# Altium PCB PCB3.0.PcbDoc
Units mm, origin at the board's own origin, x right, y up, seen from the top; angles counter-clockwise.
Board outline 90.41 x 90.41 mm, 2 copper layers (Top Layer, Bottom Layer); 100 components, 102 nets, 468 pads, 16 vias.
Unrouted connection lines stored in the file: 290.
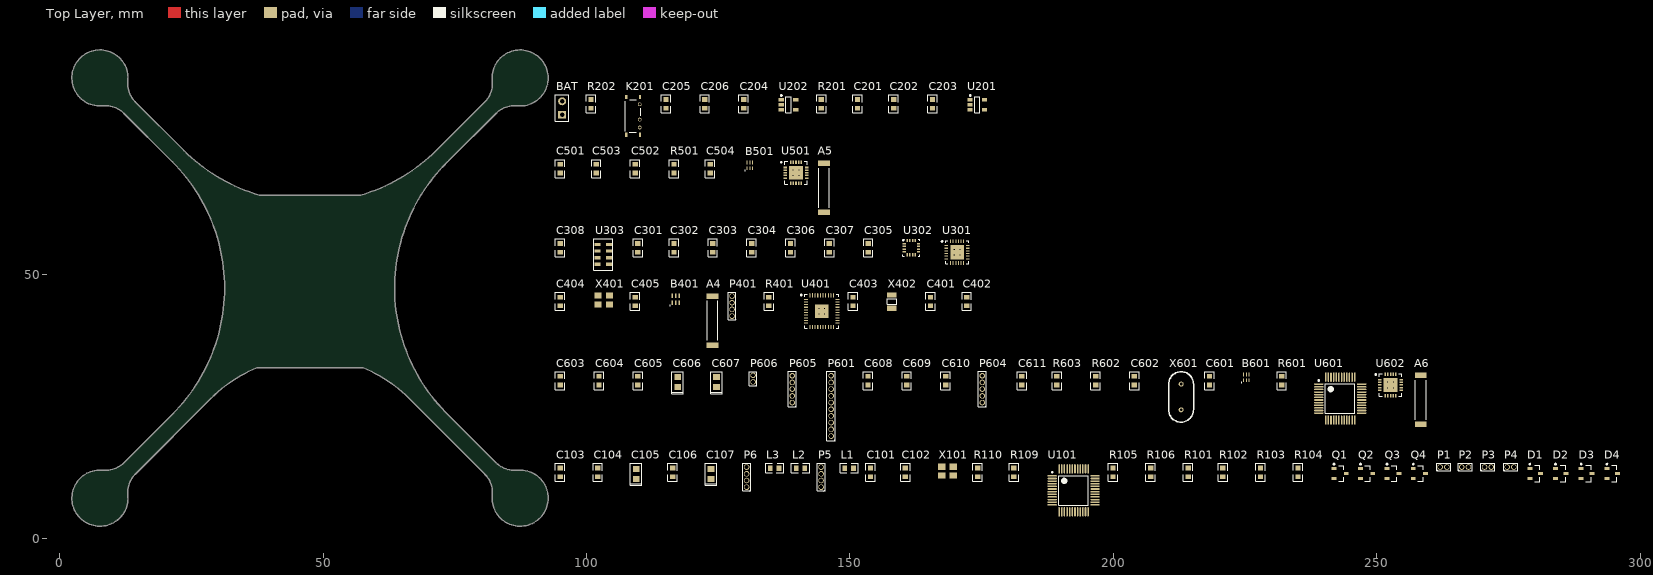
[diagram p0: Top Layer view]
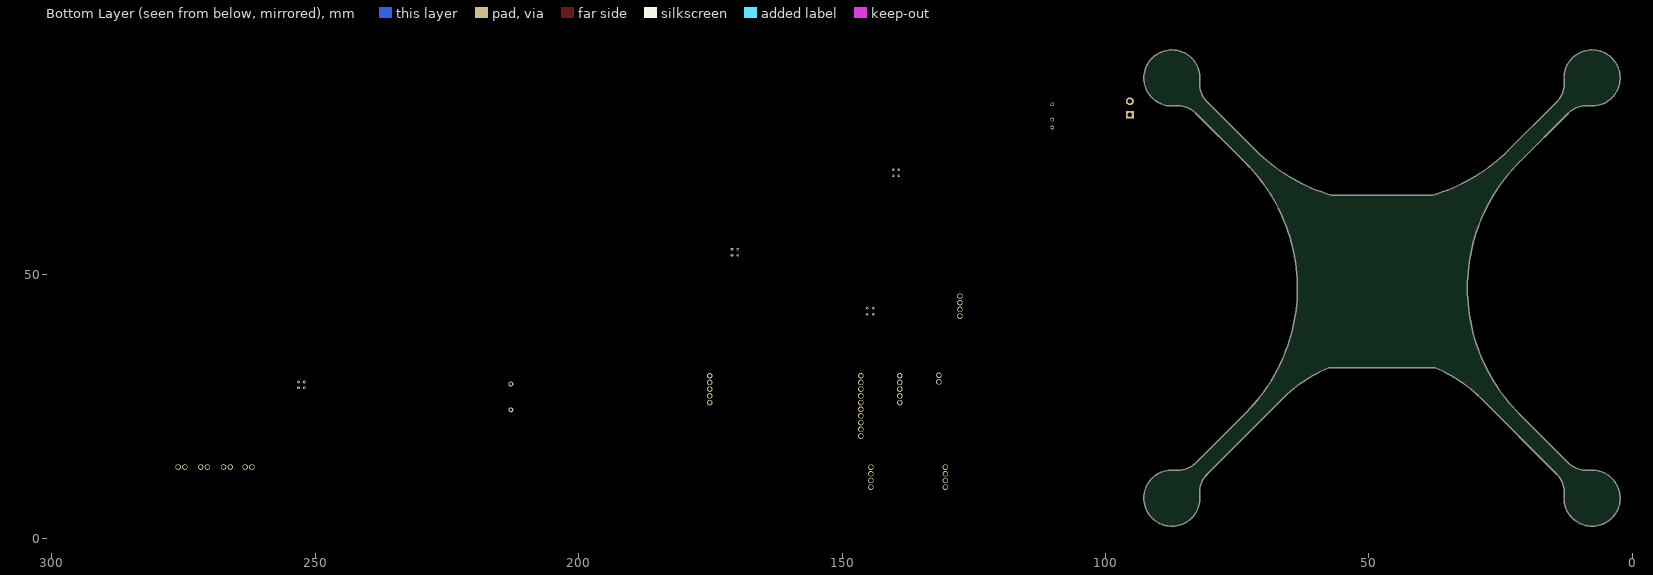
[diagram p1: Bottom Layer view, seen from below]

## Layer stack, top to bottom
Top Solder: solder mask 0.0102, Solder Resist, Dk 3.5
Top Layer: signal copper 0.0356
Dielectric 1: dielectric 0.32, FR-4, Dk 4.8
Bottom Layer: signal copper 0.0356
Bottom Solder: solder mask 0.0102, Solder Resist, Dk 3.5

## Board outline
12.914,8.189 cw(c17.761,8.71) 14.314,12.157 ccw(c14.225,12.245) 14.315,12.158 ccw(c14.227,12.248) 14.316,12.159 28.766,26.609 ccw(c28.677,26.698) 28.771,26.614 ccw(c28.687,26.708) 28.776,26.619 cw(c47.5,7.895) 37.404,32.375 57.595,32.375 cw(c47.5,7.895) 66.224,26.619 ccw(c66.312,26.708) 66.229,26.614 ccw(c66.322,26.697) 66.234,26.609 80.686,12.157 cw(c80.775,12.245) 80.686,12.157 cw(c77.239,8.71) 82.114,8.71 cw(c77.239,8.71) 82.086,8.189 cw(c77.239,8.71) 82.086,8.189 cw(c82.21,8.175) 82.086,8.189 ccw(c87.381,7.619) 92.706,7.619 ccw(c87.381,7.619) 86.811,12.914 ccw(c86.825,12.789) 86.81,12.914 cw(c86.29,17.761) 82.869,14.288 cw(c86.29,17.761) 82.843,14.314 ccw(c82.755,14.225) 82.843,14.314 73.176,23.981 cw(c97.129,47.506) 73.564,71.42 ccw(c73.516,71.536) 73.604,71.447 73.991,71.833 82.843,80.686 cw(c82.755,80.775) 82.843,80.686 cw(c86.29,77.239) 86.81,82.086 cw(c86.29,77.239) 86.811,82.086 ccw(c87.381,87.381) 92.706,87.381 ccw(c87.381,87.381) 82.086,86.811 ccw(c82.21,86.825) 82.086,86.81 cw(c77.239,86.29) 82.114,86.29 cw(c77.239,86.29) 80.686,82.843 cw(c80.775,82.755) 80.686,82.843 71.447,73.604 ccw(c47.5,97.72) 71.447,73.605 71.447,73.604 ccw(c71.536,73.516) 71.447,73.604 cw(c47.5,97.72) 57.124,65.125 37.876,65.125 cw(c47.5,97.72) 23.553,73.604 ccw(c23.464,73.516) 23.553,73.604 cw(c47.5,97.72) 23.552,73.605 23.553,73.604 14.314,82.843 cw(c14.225,82.755) 14.314,82.843 cw(c17.761,86.29) 12.914,86.81 cw(c17.761,86.29) 12.914,86.811 ccw(c7.619,87.381) 12.945,87.381 ccw(c7.619,87.381) 8.189,82.086 ccw(c8.175,82.21) 8.189,82.086 cw(c8.71,77.239) 12.157,80.686 ccw(c12.245,80.775) 12.157,80.686 21.396,71.447 ccw(c21.484,71.536) 21.396,71.447 cw(c-2.677,47.5) 31.278,47.5 cw(c-2.677,47.5) 21.396,23.553 ccw(c21.484,23.464) 21.396,23.553 12.157,14.314 ccw(c12.245,14.225) 12.157,14.314 cw(c8.71,17.761) 8.189,12.914 cw(c8.71,17.761) 8.189,12.914 ccw(c7.619,7.619) 12.945,7.619 ccw(c7.619,7.619) 12.914,8.189 ccw(c12.789,8.175)

## Design rules (kind name [scope] priority, off if disabled: settings)
Clearance [All] p1: gap=0.254
PolygonConnect [All] p1: connectstyle=Relief reliefconductorwidth=0.254 reliefentries=4 polygonreliefangle="90 Angle" airgapwidth=0.254
RoomDefinition Power [InComponentClass('Power')] p1: confinementstyle=ConfineIn formatcopy=TRUE lockcomponents=FALSE outline 93.855,75.929 177.759,75.929 177.759,86.979 93.855,86.979
RoomDefinition nRF24L01 [InComponentClass('nRF24L01')] p2: confinementstyle=ConfineIn formatcopy=TRUE lockcomponents=FALSE outline 93.855,60.903 146.832,60.903 146.832,74.679 93.855,74.679
RoomDefinition IIC_Sensor [InComponentClass('IIC_Sensor')] p3: confinementstyle=ConfineIn formatcopy=TRUE lockcomponents=FALSE outline 93.855,50.727 173.133,50.727 173.133,59.628 93.855,59.628
RoomDefinition Bluetooth [InComponentClass('Bluetooth')] p4: confinementstyle=ConfineIn formatcopy=TRUE lockcomponents=FALSE outline 93.855,35.677 177.409,35.677 177.409,49.477 93.855,49.477
RoomDefinition 24L10S [InComponentClass('24L10S')] p5: confinementstyle=ConfineIn formatcopy=TRUE lockcomponents=FALSE outline 93.855,18.276 260.088,18.276 260.088,34.427 93.855,34.427
RoomDefinition 4Z_PCB_2 [InComponentClass('4Z_PCB_2')] p6: confinementstyle=ConfineIn formatcopy=TRUE lockcomponents=FALSE outline 93.855,3.725 296.664,3.725 296.664,17.001 93.855,17.001
RoutingVias [All] p1: holewidth=0.711 width=1.27 viastyle="Through Hole" minholewidth=0.711 minwidth=1.27 maxholewidth=0.711 maxwidth=1.27
SolderMaskExpansion [All] p1: expansion=0.102
Width [All] p1: maxlimit=0.254 minlimit=0.254 preferedwidth=0.254
30 further rules are at their usual default settings.

## Classes and differential pairs
component class Power: BAT C201 C202 C203 C204 C205 C206 K201 R201 R202 U201 U202
component class nRF24L01: A5 B501 C501 C502 C503 C504 R501 U501
component class IIC_Sensor: C301 C302 C303 C304 C305 C306 C307 C308 U301 U302 U303
component class Bluetooth: A4 B401 C401 C402 C403 C404 C405 P401 R401 U401 X401 X402
component class 24L10S: A6 B601 C601 C602 C603 C604 C605 C606 C607 C608 C609 C610 C611 P601 P604 P605 P606 R601 R602 R603 U601 U602 X601
component class 4Z_PCB_2: C101 C102 C103 C104 C105 C106 C107 D1 D2 D3 D4 L1 L2 L3 P1 P2 P3 P4 P5 P6 Q1 Q2 Q3 Q4 R101 R102 R103 R104 R105 R106 R109 R110 U101 X101

## Components (designator, comment, footprint, x,y, rotation, side; value= is the part's Value field where it differs from the comment)
A4 "AN9520-245" AN9520-245 123.881,41.302 r90 top
A5 "AN9520-245" AN9520-245 145.082,66.528 r90 top
A6 "AN9520-245" AN9520-245 258.338,26.251 r90 top
B401 "2450BM15A0002E" 2450BM15A0002 116.931,45.377 r90 top
B501 "2450BN14A0002" 2450BM14A0002 130.981,70.778 r90 top
B601 "2450BN14A0002" 2450BM14A0002 225.236,30.526 r90 top
BAT "BAT" XH254 95.355,80.404 r90 top
C101 "20pF" 0603 153.858,12.476 r90 top
C102 "20pF" 0603 160.483,12.476 r90 top
C103 "100nF" 0603 94.955,12.476 r90 top
C104 "100nF" 0603 102.08,12.476 r90 top
C105 "C0805" 0805 109.405,12.226 r90 top
C106 "100nF" 0603 116.306,12.476 r90 top
C107 "C0805" 0805 123.631,12.226 r90 top
C201 "0.1uF" 0603 151.382,82.454 r90 top
C202 "0.01uF" 0603 158.258,82.454 r90 top
C203 "2.2uF" 0603 165.633,82.454 r90 top
C204 "0.1uF" 0603 129.781,82.454 r90 top
C205 "0.01uF" 0603 115.031,82.454 r90 top
C206 "2.2uF" 0603 122.406,82.454 r90 top
C301 "10nF" 0603 109.705,55.103 r90 top
C302 "2.2nF" 0603 116.556,55.103 r90 top
C303 "100nF" 0603 123.931,55.103 r90 top
C304 "100nF" 0603 131.306,55.103 r90 top
C305 "0.22uF" 0603 153.432,55.103 r90 top
C306 "4.7uF" 0603 138.682,55.103 r90 top
C307 "100nF" 0603 146.057,55.103 r90 top
C308 "100nF" 0603 94.955,55.103 r90 top
C401 "1uF" 0603 165.258,44.927 r90 top
C402 "" 0603 172.133,44.927 r90 top
C403 "" 0603 150.532,44.927 r90 top
C404 "" 0603 94.955,44.927 r90 top
C405 "" 0603 109.18,44.927 r90 top
C501 "10nF" 0603 94.955,70.153 r90 top
C502 "100nF" 0603 109.18,70.153 r90 top
C503 "33nF" 0603 101.805,70.153 r90 top
C504 "2.2nF" 0603 123.431,70.153 r90 top
C601 "22p" 0603 218.211,29.901 r90 top
C602 "22p" 0603 203.96,29.901 r90 top
C603 "100nF" 0603 94.955,29.901 r90 top
C604 "100nF" 0603 102.33,29.901 r90 top
C605 "10nF" 0603 109.705,29.901 r90 top
C606 "10uF" 0805 117.281,29.626 r90 top
C607 "1uF" 0805 124.656,29.626 r90 top
C608 "10nF" 0603 153.382,29.901 r90 top
C609 "100nF" 0603 160.758,29.901 r90 top
C610 "33nF" 0603 168.133,29.901 r90 top
C611 "2.2nF" 0603 182.609,29.901 r90 top
D1 "BAT54" BAT54 280.239,12.276 r0 top
D2 "BAT54" BAT54 285.114,12.276 r0 top
D3 "BAT54" BAT54 289.989,12.276 r0 top
D4 "BAT54" BAT54 294.864,12.276 r0 top
K201 "32开关" 32k 108.83,80.179 r90 top
L1 "" 0603 149.807,13.351 r0 top
L2 "" 0603 140.582,13.351 r0 top
L3 "" 0603 135.682,13.351 r0 top
P1 "DIP_2" DIP_2 262.663,13.526 r0 top
P2 "DIP_2" DIP_2 266.763,13.526 r0 top
P3 "DIP_2" DIP_2 271.088,13.526 r0 top
P4 "DIP_2" DIP_2 275.388,13.526 r0 top
P5 "DIP_4" DIP_4 144.507,11.601 r90 top
P6 "" DIP_4 130.381,11.601 r90 top
P401 "DIP_4" DIP_4 127.606,44.077 r90 top
P601 "DIP10_1.27mm" DIP10_1.27mm 146.432,25.126 r90 top
P604 "DIP_5_1.27mm" DIP_5_1.27mm 175.109,28.301 r90 top
P605 "DIP_5_1.27mm" DIP_5_1.27mm 139.032,28.301 r90 top
P606 "DIP_2" DIP_2 131.606,30.301 r90 top
Q1 "PMV31XN" SOT23-TO236AB 243.037,12.276 r0 top
Q2 "PMV31XN" SOT23-TO236AB 248.062,12.276 r0 top
Q3 "PMV31XN" SOT23-TO236AB 253.087,12.276 r0 top
Q4 "PMV31XN" SOT23-TO236AB 258.088,12.276 r0 top
R101 "10K" 0603 214.16,12.476 r90 top
R102 "10K" 0603 220.761,12.476 r90 top
R103 "10K" 0603 227.886,12.476 r90 top
R104 "10K" 0603 235.011,12.476 r90 top
R105 "2.2K" 0603 199.91,12.476 r90 top
R106 "2.2K" 0603 207.035,12.476 r90 top
R109 "100K" 0603 181.084,12.476 r90 top
R110 "22K" 0603 174.209,12.476 r90 top
R201 "0R" 0603 144.532,82.454 r90 top
R202 "0R" 0603 100.805,82.454 r90 top
R401 "56K" 0603 134.582,44.927 r90 top
R501 "22K" 0603 116.556,70.153 r90 top
R601 "100K" 0603 231.936,29.901 r90 top
R602 "22K" 0603 196.61,29.901 r90 top
R603 "22K" 0603 189.234,29.901 r90 top
U101 "STM32F103CB" LQFP48 192.459,9.1 r0 top
U201 "TPS79328" TPS793xx 174.158,82.279 r0 top
U202 "TPS79328" TPS793xx 138.307,82.279 r0 top
U301 "MPU6050" MPU6050 170.333,54.303 r0 top
U302 "HMC5883L" HMC5883L 161.633,55.153 r0 top
U303 "MS5611-01BA03" MS5611-01BA03 103.18,53.903 r0 top
U401 "CC254*" CC254x 144.632,43.102 r0 top
U501 "nRF24L01" nRF24L01 139.757,69.378 r0 top
U601 "STM32F103CB" LQFP48 243.062,26.501 r0 top
U602 "nRF24L01" nRF24L01 252.612,29.101 r0 top
X101 "X2" 3225 168.533,12.751 r0 top
X401 "32M" 3225 103.255,45.227 r0 top
X402 "32.768K" 3215 157.958,43.677 r90 top
X601 "8M" X1 212.86,26.826 r90 top

## Footprints (in the part's own frame and the unit in brackets; to place one, negate y for a bottom-side part, rotate by r counter-clockwise, add the part's x,y. Pads: shape width x height; smd on the part's side, far side on the other; paste and mask are expansions set on the pad)
32k [mm]
  rect 0.8x0.4 smd: 0(-3.6,-1.3) 0(-3.6,1.3) 0(3.6,-1.3) 0(3.6,1.3)
  round 0.7 hole 0.45: 1(-2.2,-1.25) 2(-0.7,-1.25) 3(2.2,-1.25)
  silkscreen extent -3.1,-1.48 3.08,1.53
0603 [mil]
  rect 35x40 smd: 1(-31.54,-1.14) 2(33.46,-1.14)
  silkscreen extent -67,-36 68,34
0805 [mm]
  rect 1.14x1.27 smd: 1(-0.955,0) 2(0.955,0)
  silkscreen extent -2.15,-1.07 2,1.07
2450BM14A0002 [mm] "Chip Array, Flat, 6-Leads, Pitch 0.50mm,  Body 1.60x0.80mm,  IPC Medium Density"
  rect 0.7x0.2 smd: 1(-0.55,0.5) 2(-0.55,0) 3(-0.55,-0.5) 4(0.55,-0.5) 5(0.55,0) 6(0.55,0.5)
  silkscreen extent -1,0.85 -0.9,0.95, body extent -0.45,-0.85 0.45,0.85, height 0.7
2450BM15A0002 [mm]
  rect 0.85x0.3 smd: 1(-0.7,0.65) 2(-0.7,0) 3(-0.7,-0.65) 4(0.7,-0.65) 5(0.7,0) 6(0.7,0.65)
  silkscreen extent -1.22,1.05 -1.13,1.15, body extent -0.67,-1.05 0.67,1.05, height 0.8
3215 [mm]
  rect 1x1.8 smd: 1(0,0) 2(2.5,0)
  silkscreen extent 0.75,-0.87 1.75,0.87
3225 [mm]
  rect 1.4x1.2 smd: 1(-1.1,-0.85) 2(1.1,-0.85) 3(1.1,0.85) 4(-1.1,0.85)
AN9520-245 [mm] "Chip Capacitor, 2-Leads, Body 9.50x2.10mm, IPC Medium Density"
  rect 1.05x2.25 smd: 1(-4.65,0) 2(4.65,0)
  silkscreen extent -3.75,-1.03 3.75,1.02, body extent -4.8,-1.1 4.8,1.1, height 1.2
BAT54 [mm] "SOT23, 3-Leads, Body 2.95x2.48mm, Pitch 0.95mm, IPC Medium Density"
  rect 0.95x0.6 smd: 1(-1.19,0.95) 2(-1.19,-0.95) 3(0.85,0)
  silkscreen extent -1.31,-1.55 0.71,1.92
CC254x [mm] "QFN, 40-Leads, Body 6.00x6.00mm, Pitch 0.50mm, Thermal Pad 4.82x4.82mm, IPC Medium Density"
  oval 0.8x0.2 smd: 1(-3.01,2.25) 2(-3.01,1.75) 3(-3.01,1.25) 4(-3.01,0.75) 5(-3.01,0.25) 6(-3.01,-0.25) 7(-3.01,-0.75) 8(-3.01,-1.25) 9(-3.01,-1.75) 10(-3.01,-2.25) 21(3.01,-2.25) 22(3.01,-1.75) 23(3.01,-1.25) 24(3.01,-0.75) 25(3.01,-0.25) 26(3.01,0.25) 27(3.01,0.75) 28(3.01,1.25) 29(3.01,1.75) 30(3.01,2.25)
  oval 0.2x0.8 smd: 11(-2.25,-3.01) 12(-1.75,-3.01) 13(-1.25,-3.01) 14(-0.75,-3.01) 15(-0.25,-3.01) 16(0.25,-3.01) 17(0.75,-3.01) 18(1.25,-3.01) 19(1.75,-3.01) 20(2.25,-3.01) 31(2.25,3.01) 32(1.75,3.01) 33(1.25,3.01) 34(0.75,3.01) 35(0.25,3.01) 36(-0.25,3.01) 37(-0.75,3.01) 38(-1.25,3.01) 39(-1.75,3.01) 40(-2.25,3.01)
  rect 2.5x2.5 smd: 41(0,0)
  silkscreen extent -4,-3.22 3.22,3.22, body extent -3.08,-3.08 3.08,3.08, height 1
DIP10_1.27mm [mm]
  round 1.05 hole 0.74: 1(-5.715,0) 2(-4.445,0) 3(-3.175,0) 4(-1.905,0) 5(-0.635,0) 6(0.635,0) 7(1.905,0) 8(3.175,0) 9(4.445,0) 10(5.715,0)
  silkscreen extent -6.63,-0.8 6.55,0.8
DIP_2 [mm]
  round 1.05 hole 0.74: 1(-0.635,0) 2(0.635,0)
  silkscreen extent -1.33,-0.7 1.35,0.7
DIP_4 [mm]
  round 1.05 hole 0.74: 1(-1.905,0) 2(-0.635,0) 3(0.635,0) 4(1.905,0)
  silkscreen extent -2.64,-0.77 2.63,0.75
DIP_5_1.27mm [mm]
  round 1.05 hole 0.74: 1(-2.54,0) 2(-1.27,0) 3(0,0) 4(1.27,0) 5(2.54,0)
  silkscreen extent -3.37,-0.75 3.37,0.75
HMC5883L [mm]
  rect 0.65x0.3 smd: 1(-1.37,0.75) 2(-1.37,0.25) 3(-1.37,-0.25) 4(-1.37,-0.75) 9(1.37,-0.75) 10(1.37,-0.25) 11(1.37,0.25) 12(1.37,0.75)
  rect 0.3x0.65 smd: 5(-0.75,-1.37) 6(-0.25,-1.37) 7(0.25,-1.37) 8(0.75,-1.37) 13(0.75,1.37) 14(0.25,1.37) 15(-0.25,1.37) 16(-0.75,1.37)
  silkscreen extent -1.65,-1.65 1.65,1.65
LQFP48 [mm] "TSQFP, 48-Leads, Body 7.00x7.00mm, Pitch 0.50mm, IPC Medium Density"
  oval 1.75x0.3 smd: 1(-4.075,2.75) 2(-4.075,2.25) 3(-4.075,1.75) 4(-4.075,1.25) 5(-4.075,0.75) 6(-4.075,0.25) 7(-4.075,-0.25) 8(-4.075,-0.75) 9(-4.075,-1.25) 10(-4.075,-1.75) 11(-4.075,-2.25) 12(-4.075,-2.75) 25(4.075,-2.75) 26(4.075,-2.25) 27(4.075,-1.75) 28(4.075,-1.25) 29(4.075,-0.75) 30(4.075,-0.25) 31(4.075,0.25) 32(4.075,0.75) 33(4.075,1.25) 34(4.075,1.75) 35(4.075,2.25) 36(4.075,2.75)
  oval 0.3x1.75 smd: 13(-2.75,-4.075) 14(-2.25,-4.075) 15(-1.75,-4.075) 16(-1.25,-4.075) 17(-0.75,-4.075) 18(-0.25,-4.075) 19(0.25,-4.075) 20(0.75,-4.075) 21(1.25,-4.075) 22(1.75,-4.075) 23(2.25,-4.075) 24(2.75,-4.075) 37(2.75,4.075) 38(2.25,4.075) 39(1.75,4.075) 40(1.25,4.075) 41(0.75,4.075) 42(0.25,4.075) 43(-0.25,4.075) 44(-0.75,4.075) 45(-1.25,4.075) 46(-1.75,4.075) 47(-2.25,4.075) 48(-2.75,4.075)
  silkscreen extent -4.2,-2.8 2.8,3.57, body extent -3.5,-3.5 3.5,3.5, height 1.6
MPU6050 [mm]
  rect 0.7x0.2 smd: 1(-2.05,1.25) 2(-2.05,0.75) 3(-2.05,0.25) 4(-2.05,-0.25) 5(-2.05,-0.75) 6(-2.05,-1.25) 13(2.05,-1.25) 14(2.05,-0.75) 15(2.05,-0.25) 16(2.05,0.25) 17(2.05,0.75) 18(2.05,1.25)
  rect 0.2x0.7 smd: 7(-1.25,-2.05) 8(-0.75,-2.05) 9(-0.25,-2.05) 10(0.25,-2.05) 11(0.75,-2.05) 12(1.25,-2.05) 19(1.25,2.05) 20(0.75,2.05) 21(0.25,2.05) 22(-0.25,2.05) 23(-0.75,2.05) 24(-1.25,2.05)
  rect 2.6x2.7 smd: 25(0,0)
  silkscreen extent -2.97,-2.2 2.2,2.2, body extent -2.05,-2.05 2.05,2.05, height 0.85
MS5611-01BA03 [mm]
  rect 1.1x0.6 smd: 1(-1.1,1.85) 2(-1.1,0.6) 3(-1.1,-0.65) 4(-1.1,-1.9) 5(1.1,-1.9) 6(1.1,-0.65) 7(1.1,0.6) 8(1.1,1.85)
  round 0.2 on Top Overlay: ""(-1.5,2.7)
  silkscreen extent -1.8,-3 1.8,3
nRF24L01 [mm]
  rect 0.65x0.3 smd: 1(-2.025,1) 2(-2.025,0.5) 3(-2.025,0) 4(-2.025,-0.5) 5(-2.025,-1) 11(2.025,-1) 12(2.025,-0.5) 13(2.025,0) 14(2.025,0.5) 15(2.025,1)
  rect 0.3x0.65 smd: 6(-1,-2.025) 7(-0.5,-2.025) 8(0,-2.025) 9(0.5,-2.025) 10(1,-2.025) 16(1,2.025) 17(0.5,2.025) 18(0,2.025) 19(-0.5,2.025) 20(-1,2.025)
  rect 2.6x2.6 smd: 21(0,0)
  silkscreen extent -2.92,-2.15 2.15,2.15, body extent -2,-2 2,2, height 0.95
SOT23-TO236AB [mm] "SOT23, 3-Leads, Body 2.90x2.30mm, Pitch 0.95mm, IPC Medium Density"
  rect 0.9x0.6 smd: 1(-1.15,0.95) 2(-1.15,-0.95) 3(1.15,0)
  silkscreen extent -1.27,-1.5 0.7,1.92, body extent -0.7,-1.5 0.7,1.5, height 1.1
TPS793xx [mm] "SOT23, 6-Leads, Body 2.90x2.80mm, Pitch 0.95mm, IPC Medium Density"
  rect 1x0.6 smd: 1(-1.375,0.95) 2(-1.375,0) 3(-1.375,-0.95) 4(1.375,-0.95) 5(1.375,0.95)
  silkscreen extent -1.45,-1.55 0.5,1.9, body extent -0.88,-1.52 0.87,1.53, height 1.45
X1 [mm]
  round 0.94 hole 0.52: 1(2.44,0) 2(-2.44,0)
  silkscreen extent -4.79,-2.35 4.79,2.35
XH254 [mm]
  rect 1.5x1.5 hole 0.9: 1(0,0)
  round 1.5 hole 0.9: 2(2.54,0)
  silkscreen extent -1.27,-1.27 3.81,1.27

## Part data
A4 A5 A6: "antenna"
B401: "CC2541"
B501 B601: "nRF24L01"
C101 C102 C103 C104 C106 C201 C202 C203 C204 C205 C206 C301 C302 C303 C304 C305 C306 C307 C308 C401 C402 C403 C404 C405 C501 C502 C503 C504 C601 C602 C603 C604 C605 C608 C609 C610 C611: library part C0603
C606 C607: library part C0805
L1 L2 L3 R101 R102 R103 R104 R105 R106 R109 R110 R201 R202 R401 R501 R601 R602 R603: library part R0603
P6: library part DIP_4
U201 U202: library part TPS793xx
U401: library part CC254x
X101: "3225"
X401: library part X2, "3225"
X402: library part X3, "3215"
X601: library part X1

## Via types
v1: diameter 0.5, hole 0.2, Top Layer to Bottom Layer, 16 vias

## Nets (pads, with @x,y where several pads share a name; then routed paths per layer and width w, separated by ;. In a path a pad name is that pad's centre, name@x,y a point inside that pad or via, vN(x,y) a via of type N, cw(c..) or ccw(c..) an arc to the next point about the centre after c; other vN are vias at no path point)
24L01_CE: U601.22 U602.1
24L01_INT: U601.29 U602.6
AGND: C101.1 C102.1 C106.1 C107.2 C202.1 C203.1 C301.1 C302.1 C303.1 C304.1 C306.1 C307.1 C308.1 L1.1 L2.1 L3.1 R201.1 U101.8 U301.1 U301.18 U301.25 U302.9 U302.11 U303.3 U303.4 U303.5 X101.2 X101.4
  other v1: 169.783,53.753 170.883,53.753 169.783,54.853 170.883,54.853
AVCC: C106.2 C107.1 C203.2 C301.2 C304.2 C307.2 C308.2 R105.1 R106.1 U101.9 U201.5 U301.8 U301.9 U301.13 U302.2 U302.4 U302.6 U302.13 U303.1 U303.2
BAT+: BAT.2 K201.2 P5.1
BGND: A4.2 B401.2 B401.5 B401.6 C401.2 C402.1 C403.1 C404.1 C405.2 P401.4 R401.1 U401.1 U401.41 X401.2 X401.4
  other v1: 144.082,42.552 145.182,42.552 144.082,43.652 145.182,43.652
BVCC: P401.1 U401.10 U401.21 U401.24 U401.27 U401.28 U401.29 U401.31 U401.39
DGND: A5.2 C103.1 C104.1 C105.2 C205.1 C206.1 C501.1 C502.2 C503.1 C504.1 P6.4 R109.2 R202.1 R501.2 U101.23 U101.35 U101.47 U501.8 U501.14 U501.17 U501.20 U501.21
  other v1: 139.207,68.828 140.307,68.828 139.207,69.928 140.307,69.928
GND: BAT.1 C201.1 C204.1 P5.4 Q1.2 Q2.2 Q3.2 Q4.2 R101.2 R102.2 R103.2 R104.2 R201.2 R202.2 U201.2 U202.2
IIC_SCL: R105.2 U101.21 U301.23 U303.8
IIC_SDA: R106.2 U101.22 U301.24 U303.7
INT_HMC: U101.29 U302.15
INT_MPU: U101.30 U301.12
M1: Q1.1 R101.1 U101.16
M2: Q2.1 R102.1 U101.17
M3: Q3.1 R103.1 U101.18
M4: Q4.1 R104.1 U101.19
MOTER+: C201.2 C204.2 D1.3 D2.3 D3.3 D4.3 K201.1 P1.2 P2.2 P3.2 P4.2 U201.1 U201.3 U202.1 U202.3
NetA4_1: A4.1 B401.1
NetA5_1: A5.1 B501.1
NetA6_1: A6.1 B601.1
NetB401_3: B401.3 U401.26
NetB401_4: B401.4 U401.25
NetB501_3: B501.3 U501.13
NetB501_4: B501.4 U501.12
NetB501_5: B501.5 C504.2 U501.11
NetB601_3: B601.3 U602.13
NetB601_4: B601.4 U602.12
NetB601_5: B601.5 C611.2 U602.11
NetC101_2: C101.2 U101.5 X101.1
NetC102_2: C102.2 U101.6 X101.3
NetC202_2: C202.2 U201.4
NetC205_2: C205.2 U202.4
NetC302_2: C302.2 U301.20
NetC303_2: C303.2 U301.10
NetC305_1: C305.1 U302.12
NetC305_2: C305.2 U302.8
NetC306_2: C306.2 U302.10
NetC401_1: C401.1 U401.40
NetC402_2: C402.2 U401.32 X402.2
NetC403_2: C403.2 U401.33 X402.1
NetC404_2: C404.2 U401.22 X401.1
NetC405_1: C405.1 U401.23 X401.3
NetC503_2: C503.2 U501.19
NetC601_2: C601.2 U601.5 X601.2
NetC602_2: C602.2 U601.6 X601.1
NetC610_2: C610.2 U602.19
NetD1_1: D1.1 P1.1 Q1.3
NetD2_1: D2.1 P2.1 Q2.3
NetD3_1: D3.1 P3.1 Q3.3
NetD4_1: D4.1 P4.1 Q4.3
NetL1_2: L1.2 U101.41
NetL2_2: L2.2 P6.3 U101.42
NetL3_2: L3.2 P6.2 U101.43
NetP401_2: P401.2 U401.2
NetP401_3: P401.3 U401.3
NetP601_1: P601.1 U601.10
NetP601_2: P601.2 U601.11
NetP601_3: P601.3 U601.12
NetP601_4: P601.4 U601.13
NetP601_5: P601.5 U601.14
NetP601_6: P601.6 U601.15
NetP601_7: P601.7 U601.16
NetP601_8: P601.8 U601.17
NetP601_9: P601.9 U601.18
NetP601_10: P601.10 U601.19
NetP604_1: P604.1 U601.33
NetP604_2: P604.2 U601.34
NetP604_3: P604.3 U601.37
NetP604_4: P604.4 U601.38
NetP604_5: P604.5 U601.39
NetP605_1: P605.1 U601.40
NetP605_2: P605.2 U601.41
NetP605_3: P605.3 U601.42
NetP605_4: P605.4 U601.43
NetP605_5: P605.5 U601.45
NetR109_1: R109.1 U101.44
NetR110_1: R110.1 U101.7
NetR401_2: R401.2 U401.30
NetR501_1: R501.1 U501.16
NetR601_2: R601.2 U601.44
NetR602_1: R602.1 U601.7
NetR603_1: R603.1 U602.16
NetU101_25: U101.25 U501.2
NetU101_26: U101.26 U501.3
NetU101_27: U101.27 U501.5
NetU101_28: U101.28 U501.4
NetU101_31: U101.31 U501.1
NetU101_32: U101.32 U501.6
NetU301_6: U301.6 U302.16
NetU301_7: U301.7 U302.1
NetU601_25: U601.25 U602.2
NetU601_26: U601.26 U602.3
NetU601_27: U601.27 U602.5
NetU601_28: U601.28 U602.4
NetU601_30: U601.30 U602.10
PIN24: C103.2 C104.2 C105.1 C206.2 C501.2 C502.1 P6.1 R110.2 U101.1 U101.24 U101.36 U101.48 U202.5 U501.7 U501.15 U501.18
SAGND: A6.2 B601.2 C601.1 C602.1 C603.1 C604.1 C605.1 C606.2 C607.2 C608.1 C609.1 C610.1 C611.1 P606.2 R601.1 R603.2 U601.8 U601.23 U601.35 U601.47 U602.8 U602.14 U602.17 U602.20 U602.21
  other v1: 252.062,28.551 253.162,28.551 252.062,29.651 253.162,29.651
SPIN9: C603.2 C604.2 C605.2 C606.1 C607.1 C608.2 C609.2 P606.1 R602.2 U601.1 U601.9 U601.24 U601.36 U601.48 U602.7 U602.15 U602.18
SWCLK: P5.3 U101.37
SWDIO: P5.2 U101.34
W_CLK: U101.45 U501.10
pads on no net: B501.2 B501.6 B601.6 D1.2 D2.2 D3.2 D4.2 K201.0 K201.3 U101.2 U101.3 U101.4 U101.10 U101.11 U101.12 U101.13 U101.14 U101.15 U101.20 U101.33 U101.38 U101.39 U101.40 U101.46 U301.2 U301.3 U301.4 U301.5 U301.11 U301.14 U301.15 U301.16 U301.17 U301.19 U301.21 U301.22 U302.3 U302.5 U302.7 U302.14 U303. U303.6 U401.4 U401.5 U401.6 U401.7 U401.8 U401.9 U401.11 U401.12 U401.13 U401.14 U401.15 U401.16 U401.17 U401.18 U401.19 U401.20 U401.34 U401.35 U401.36 U401.37 U401.38 U501.9 U601.2 U601.3 U601.4 U601.20 U601.21 U601.31 U601.32 U601.46 U602.9

## Silkscreen, mask and mechanical layers (free items; w line width, h text height)
Mechanical 1:
  lines w0.25: 12.173,80.847 21.484,71.536 cw(c-2.677,47.5) 21.484,23.464 12.245,14.225 cw(c8.71,17.761) 8.175,12.789 ccw(c7.619,7.619) 12.789,8.175 cw(c17.761,8.71) 14.225,12.245 ; 12.245,80.775 ccw(c8.71,77.239) 8.175,82.21 cw(c7.619,87.381) 12.789,86.825 ccw(c17.761,86.29) 14.225,82.755 23.464,73.516 ccw(c47.5,97.72) 37.858,65 57.142,65 ccw(c47.5,97.72) 71.536,73.516 80.775,82.755 ccw(c77.239,86.29) 82.21,86.825 cw(c87.381,87.381) 86.825,82.21 ccw(c86.29,77.239) 82.755,80.775 73.516,71.536 ; 14.227,12.248 28.677,26.698 ; 28.687,26.708 cw(c47.5,7.895) 37.38,32.5 ; 37.38,32.5 57.62,32.5 ; 57.62,32.5 cw(c47.5,7.895) 66.312,26.708 ; 66.322,26.697 80.775,12.245 cw(c77.239,8.71) 82.21,8.175 ccw(c87.381,7.619) 86.825,12.789 cw(c86.29,17.761) 82.755,14.225 ; 73.087,23.893 82.78,14.199 ; 73.516,23.464 cw(c97.129,47.506) 73.901,71.921